# Altium PCB BLDC_BridgeBoard_PCB.PcbDoc
Units mm, origin at the board's own origin, x right, y up, seen from the top; angles counter-clockwise.
Board outline 100 x 87 mm, 4 copper layers (Top Layer, Int1 (GND), Int2 (V12), Bottom Layer), stack 1.369 mm thick; 79 components, 43 nets, 253 pads, 68 vias.
Unrouted connection lines stored in the file: 79.
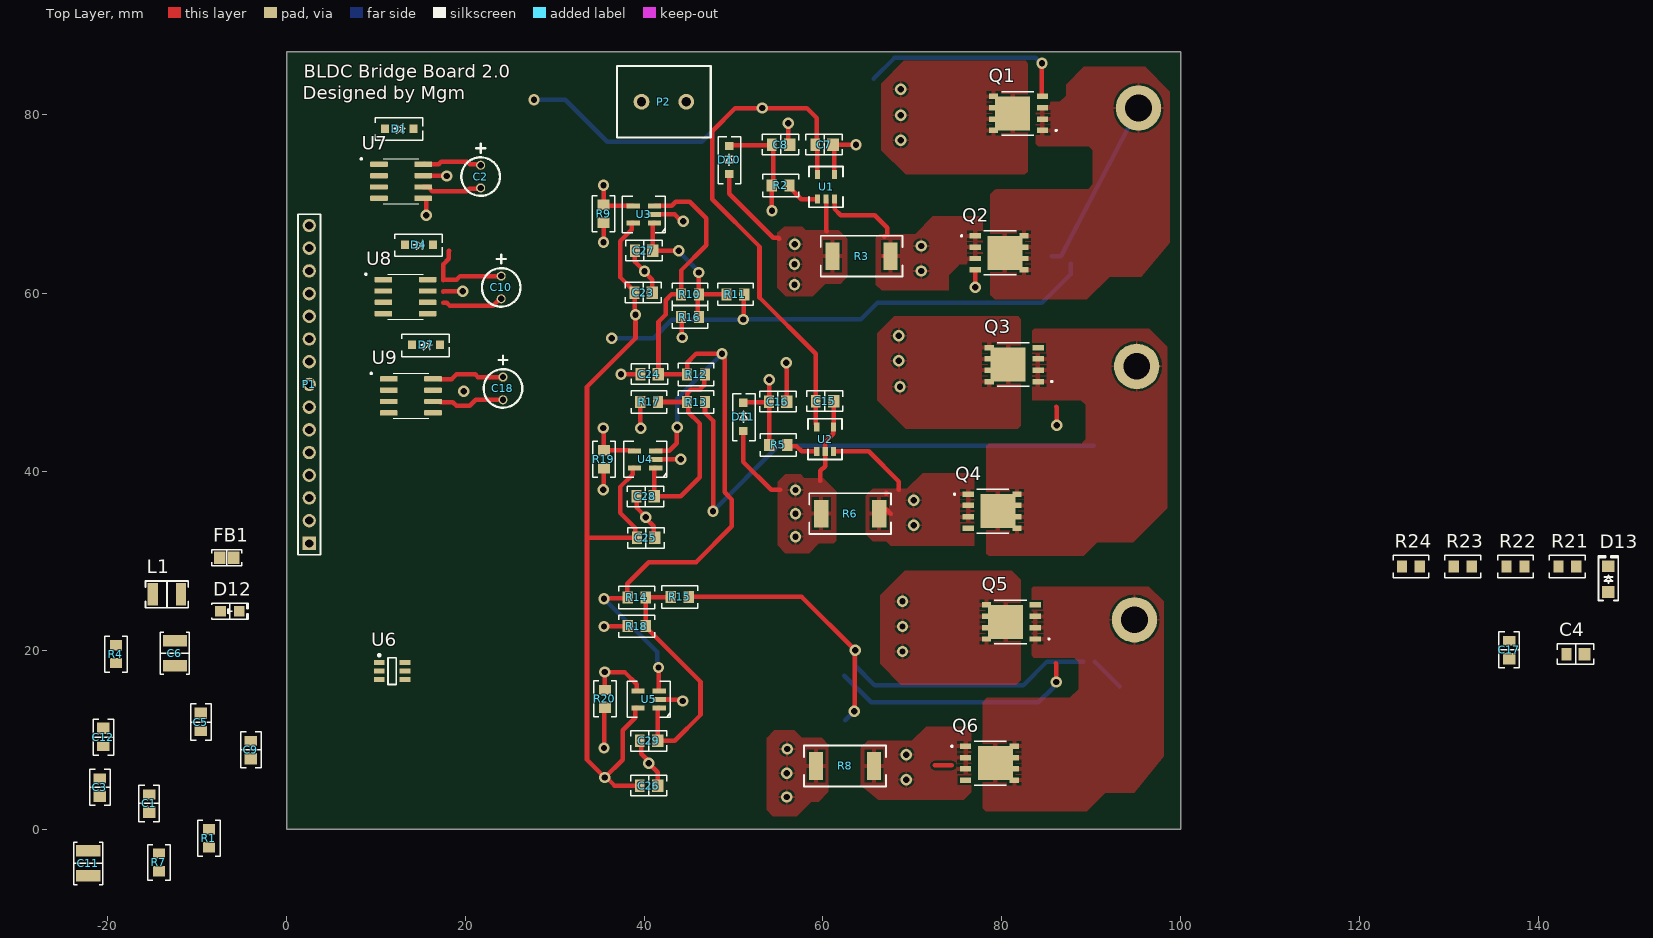
[diagram p0: Top Layer view]
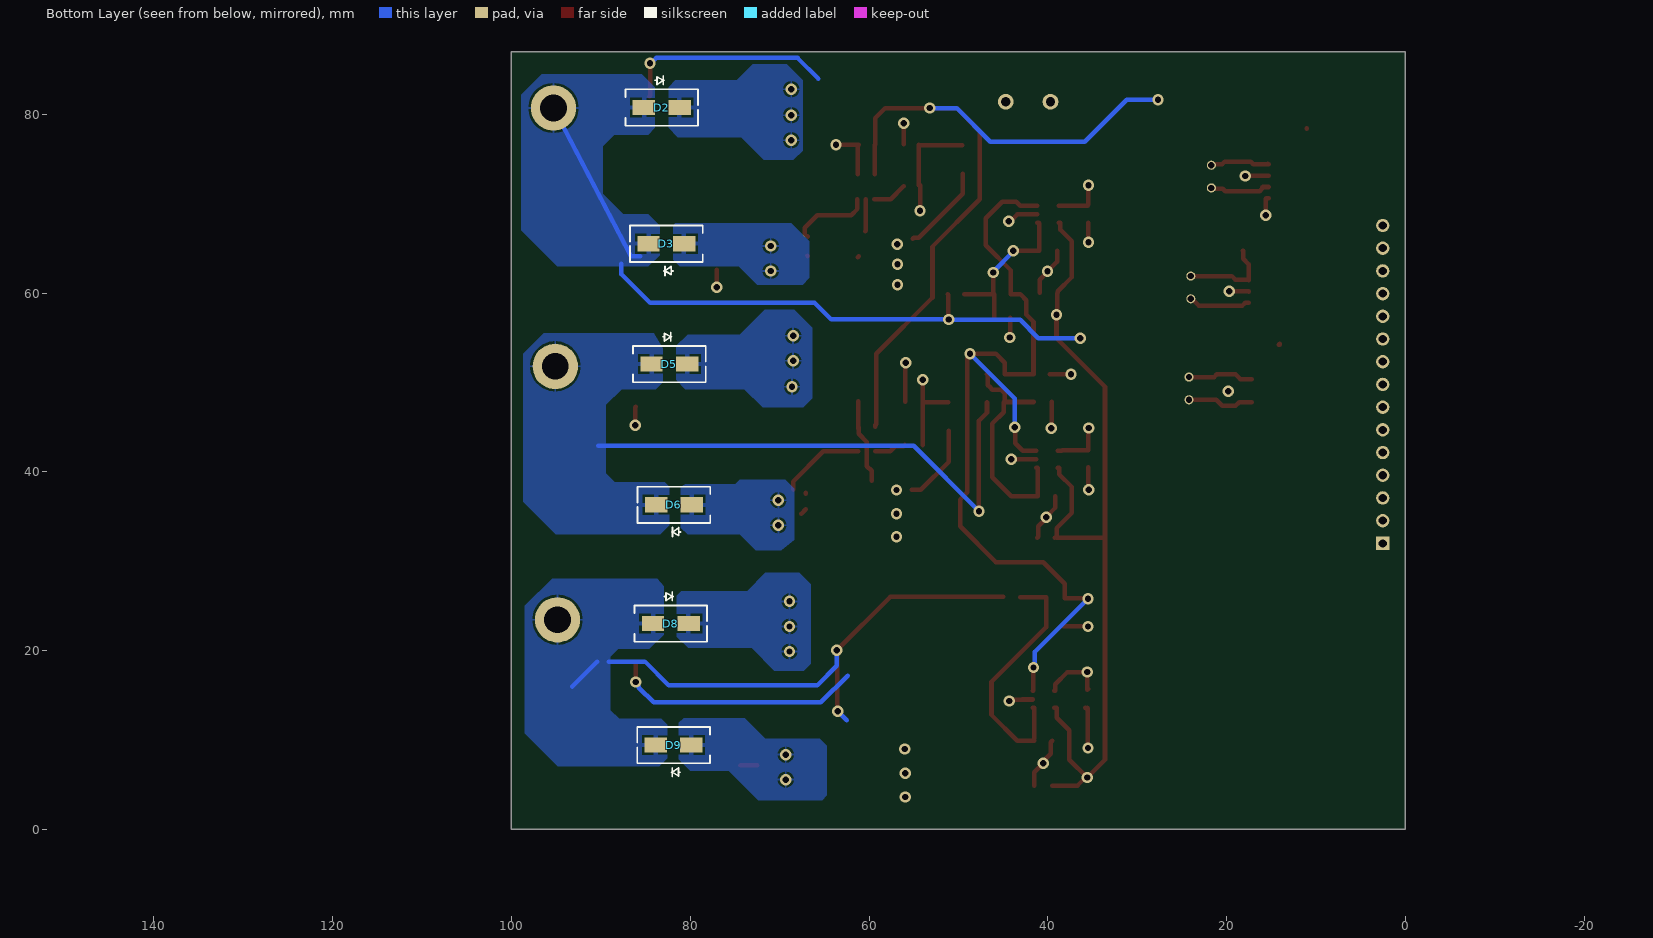
[diagram p1: Bottom Layer view, seen from below]
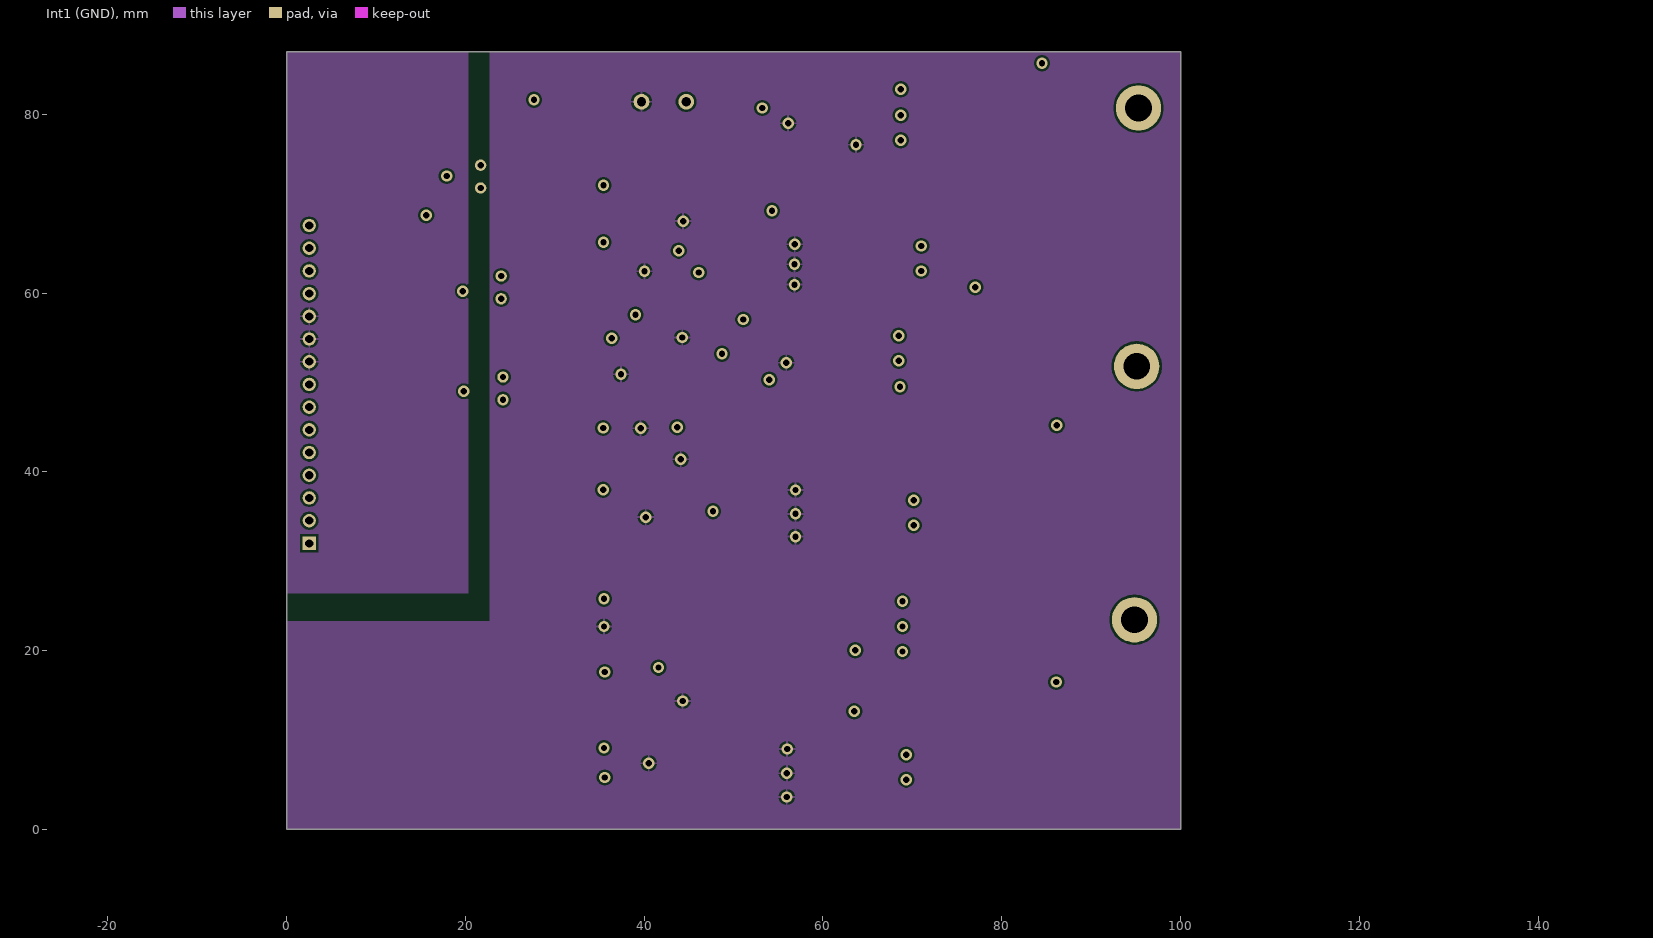
[diagram p2: Int1 (GND)]
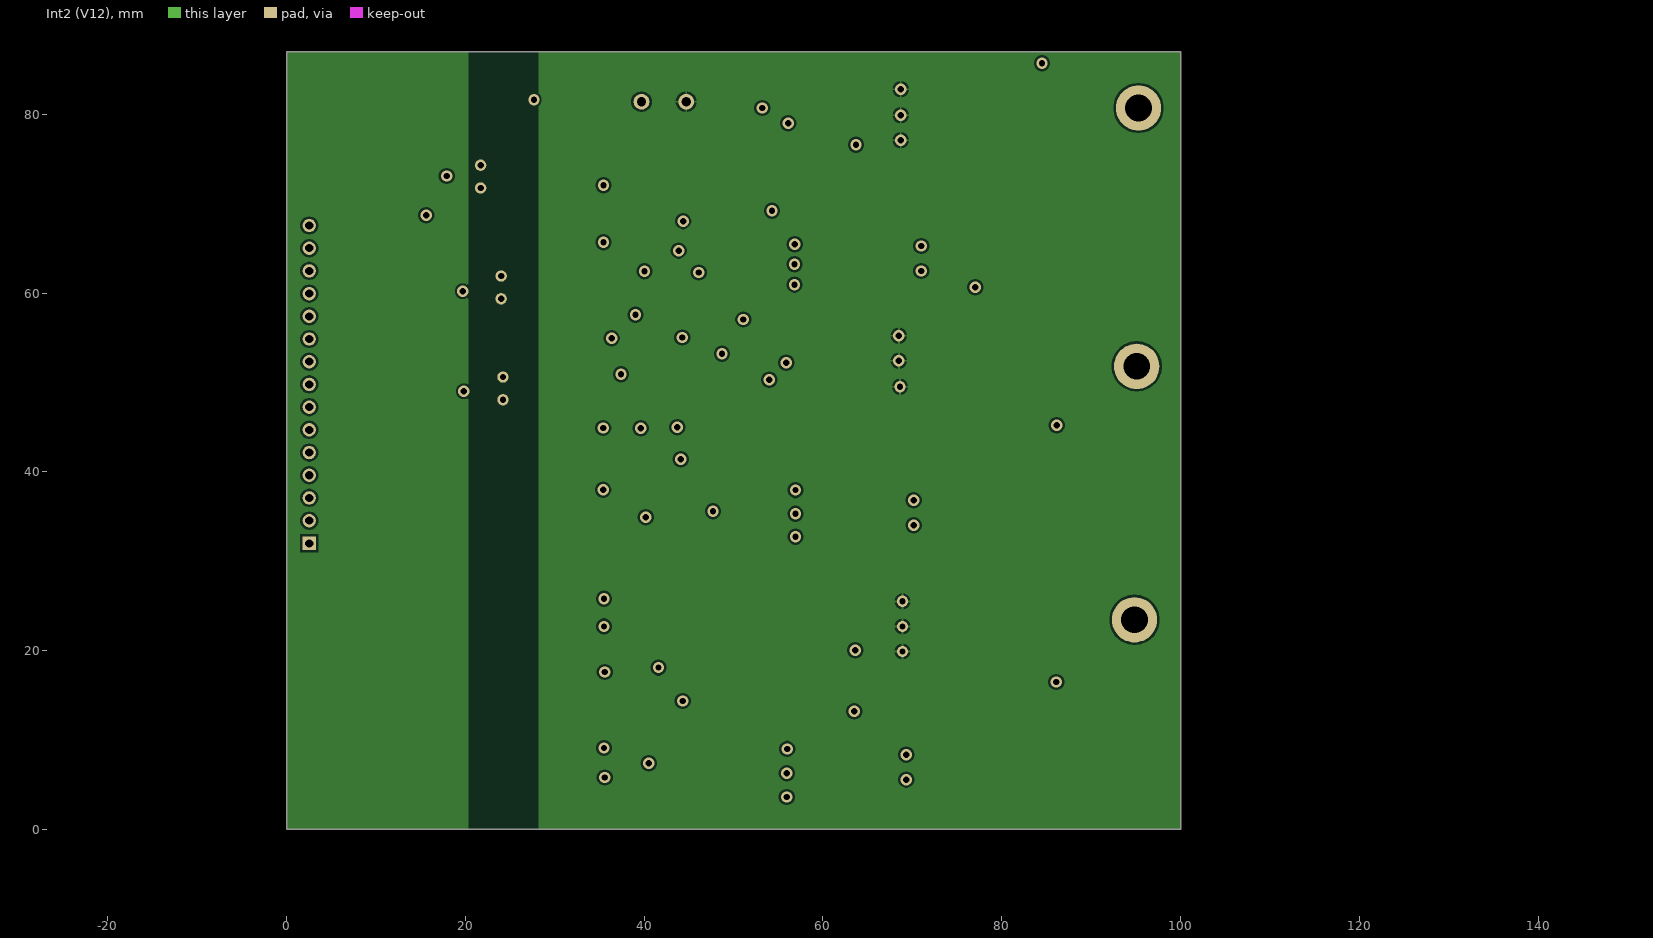
[diagram p3: Int2 (V12)]

## Layer stack, top to bottom
Top Solder: solder mask 0.0254, SM-001, Dk 4
Top Layer: signal copper 0.035
Dielectric 1: prepreg 0.1295, PP-017, Dk 4.3
Dielectric 2: prepreg 0.1295, PP-017, Dk 4.3
Int1 (GND): signal copper 0.035
Dielectric 3: core 0.7112, Core-039, Dk 4.8
Int2 (V12): signal copper 0.035
Dielectric 4: prepreg 0.1295, PP-017, Dk 4.3
Dielectric 5: prepreg 0.1295, PP-017, Dk 4.3
Bottom Layer: signal copper 0.035
Bottom Solder: solder mask 0.0254, SM-001, Dk 4

## Board outline
0,0 100,0 100,87 0,87

## Design rules (kind name [scope] priority, off if disabled: settings)
Clearance [All] p1: gap=0.254 ignorepadtopadclearanceinfootprint=FALSE except(0: Arc-Hole Track-Hole SMDPad-Hole THPad-Hole Via-Hole Fill-Hole Poly-Hole Region-Hole Text-Hole)
HoleSize [All] p1: absolutevalues=TRUE maxlimit=4 minlimit=0.025 maxpercent=80.000 minpercent=20.000
MinimumSolderMaskSliver [All] p1: minsoldermaskwidth=0.22
PolygonConnect PolygonConnect_2 [(IsNamedPolygon('PolygonBigThermal'))] p1: thpad.connectstyle=Relief thpad.reliefconductorwidth=2 thpad.reliefentries=4 thpad.polygonreliefangle="90 Angle" thpad.airgapwidth=0.254 smdpad.connectstyle=Relief smdpad.reliefconductorwidth=2 smdpad.reliefentries=4 smdpad.polygonreliefangle="90 Angle" smdpad.airgapwidth=0.254 via.connectstyle=Direct via.reliefconductorwidth=0.254 via.reliefentries=4 via.polygonreliefangle="90 Angle" via.airgapwidth=0.254
PolygonConnect PolygonConnect_1 [(IsNamedPolygon('PolygonDirect'))] p2: connectstyle=Direct reliefconductorwidth=2 reliefentries=4 polygonreliefangle="90 Angle" airgapwidth=0.254
PolygonConnect [All] p3: thpad.connectstyle=Relief thpad.reliefconductorwidth=0.254 thpad.reliefentries=4 thpad.polygonreliefangle="90 Angle" thpad.airgapwidth=0.254 smdpad.connectstyle=Relief smdpad.reliefconductorwidth=0.508 smdpad.reliefentries=4 smdpad.polygonreliefangle="90 Angle" smdpad.airgapwidth=0.254 via.connectstyle=Relief via.reliefconductorwidth=0.254 via.reliefentries=4 via.polygonreliefangle="90 Angle" via.airgapwidth=0.254
RoutingVias [All] p1: holewidth=0.711 width=1.27 viastyle="Through Hole" minholewidth=0.711 minwidth=1.27 maxholewidth=0.711 maxwidth=1.27
SolderMaskExpansion [All] p1: expansion=0.102 istentingtop=FALSE
UnRoutedNet [All] p1: checkbadconnections=TRUE
Width [All] p1: maxlimit=0.762 minlimit=0.254 preferedwidth=0.508 midlayer1_maxwidth=0.254 midlayer1_prefwidth=0.254 midlayer2_maxwidth=0.254 midlayer2_prefwidth=0.254 minimp=50.000000 maximp=50.000000 favimp=50.000000
27 further rules are at their usual default settings.

## Classes and differential pairs
component class U_6_Power: C3 C4 C5 C6 C11 C12 D12 D13 FB1 L1 R1 R4 R7 R21 R22 R23 R24 U6
component class U_5_ZeroCrossingDetector: C23 C24 C25 C26 C27 C28 C29 R9 R10 R11 R12 R13 R14 R15 R16 R17 R18 R19 R20 U3 U4 U5
component class U_4_Connectors: P1 P2
component class U_3_FET_C: C17 C18 D7 D8 D9 Q5 Q6 R8 U9
component class U_2_FET_B: C9 C10 C15 C16 D4 D5 D6 D11 Q3 Q4 R5 R6 U2 U8
component class U_1_FET_A: C1 C2 C7 C8 D1 D2 D3 D10 Q1 Q2 R2 R3 U1 U7

## Components (designator, comment, footprint, x,y, rotation, side; value= is the part's Value field where it differs from the comment)
C1 "1 µF" "CAP 0805_2012" -15.4,2.9 r270 top
C2 "Cap Pol1" CAPACITORRADIALELECTROLYTIC 21.7,74.3 r270 top value=CB
C3 "0.1 µF" "CAP 0805_2012" -20.9,4.7 r270 top
C4 "0.1 µF" "CAP 0805_2012" 144.2,19.6 r0 top
C5 "0.1 µF" "CAP 0805_2012" -9.6,12 r90 top
C6 "47 µF" "CAP 1210_3225 - 1MM" -12.5,19.7 r270 top
C7 "0.1 µF" "CAP 0805_2012" 60.128,76.608 r0 top
C8 "1 nF" "CAP 0805_2012" 55.264,76.608 r0 top
C9 "1 µF" "CAP 0805_2012" -4,8.9 r270 top
C10 "Cap Pol1" CAPACITORRADIALELECTROLYTIC 24,61.9 r270 top value=CB
C11 "47 µF" "CAP 1210_3225 - 1MM" -22.2,-3.8 r270 top
C12 "10 nF" "CAP 0805_2012" -20.5,10.3 r90 top
C15 "0.1 µF" "CAP 0805_2012" 60.2,47.9 r0 top
C16 "1 nF" "CAP 0805_2012" 54.954,47.843 r0 top
C17 "1 µF" "CAP 0805_2012" 136.779,20.1 r270 top
C18 "Cap Pol1" CAPACITORRADIALELECTROLYTIC 24.2,50.6 r270 top value=CB
C23 "1 nF" "CAP 0805_2012" 39.901,60.038 r0 top
C24 "1 nF" "CAP 0805_2012" 40.584,50.922 r0 top
C25 "1 nF" "CAP 0805_2012" 40.2,32.6 r0 top
C26 "1 nF" "CAP 0805_2012" 40.5,4.9 r0 top
C27 "1 nF" "CAP 0805_2012" 39.964,64.736 r0 top
C28 "1 nF" "CAP 0805_2012" 40.144,37.263 r0 top
C29 "1 nF" "CAP 0805_2012" 40.5,9.9 r0 top
D1 "1N5819WS" SOD-123 12.6,78.4 r0 top
D2 "SK510A-LTP" "DO214AC SMA" 83.186,80.758 r180 bottom
D3 "SK510A-LTP" "DO214AC SMA" 82.678,65.518 r0 bottom
D4 "1N5819WS" SOD-123 14.8,65.4 r0 top
D5 "SK510A-LTP" "DO214AC SMA" 82.332,52.056 r180 bottom
D6 "SK510A-LTP" "DO214AC SMA" 81.824,36.308 r0 bottom
D7 "1N5819WS" SOD-123 15.6,54.2 r0 top
D8 "SK510A-LTP" "DO214AC SMA" 82.176,23.016 r180 bottom
D9 "SK510A-LTP" "DO214AC SMA" 81.872,9.427 r0 bottom
D10 "BZT52C3V0-TP" SOD-123 49.5,74.9 r90 top
D11 "BZT52C3V0-TP" SOD-123 51.1,46.15 r90 top
D12 "Green" "LED 0805_2012 GREEN" -6.35,24.4 r0 top
D13 "VTVS58ASMF-HM3-08" "SMF DO-219AB" 147.879,28 r90 top
FB1 "120 Ohms @ 100 MHz" "FER 0805_2012" -6.7,30.4 r0 top
L1 "22u" "1210 Inductor" -13.4,26.3 r0 top
P1 "Header 15" HDR1X15 2.526,31.996 r90 top
P2 "Header 2" "SCREW HEADER 2 (5 MM PITCH)" 42.2,81.4 r0 top
Q1 "SIR182DP" TRANS_SIR182DP-T1-RE3 81.895,80.095 r180 top
Q2 "SIR182DP" TRANS_SIR182DP-T1-RE3 79.7,64.5 r0 top
Q3 "SIR182DP" TRANS_SIR182DP-T1-RE3 81.4,52 r180 top
Q4 "SIR182DP" TRANS_SIR182DP-T1-RE3 78.91,35.6 r0 top
Q5 "SIR182DP" TRANS_SIR182DP-T1-RE3 81.09,23.2 r180 top
Q6 "SIR182DP" TRANS_SIR182DP-T1-RE3 78.61,7.4 r0 top
R1 "110 kOhms" "RES 0805_2012" -8.7,-1 r90 top
R2 "1 kOhms" "RES 0805_2012" 55.264,72.036 r180 top
R3 "60 mOhms" "STACKPOLE CSR2512" 64.314,64.121 r0 top value="500 µOhms"
R4 "4.7 kOhms" "RES 0805_2012" -19.1,19.6 r90 top
R5 "1 kOhms" "RES 0805_2012" 55,43 r0 top
R6 "60 mOhms" "STACKPOLE CSR2512" 63.042,35.324 r0 top value="500 µOhms"
R7 "75 kOhms" "RES 0805_2012" -14.3,-3.7 r90 top
R8 "60 mOhms" "STACKPOLE CSR2512" 62.466,7.09 r0 top value="500 µOhms"
R9 "10 k" "RES 0805_2012" 35.45,68.875 r270 top
R10 "47 k" "RES 0805_2012" 45.121,59.858 r180 top
R11 "47 k" "RES 0805_2012" 50.201,59.858 r180 top
R12 "47 k" "RES 0805_2012" 45.8,50.9 r180 top
R13 "47 k" "RES 0805_2012" 45.8,47.8 r180 top
R14 "47 k" "RES 0805_2012" 39.167,25.948 r180 top
R15 "47 k" "RES 0805_2012" 43.979,25.997 r180 top
R16 "10 k" "RES 0805_2012" 45.121,57.318 r180 top
R17 "10 k" "RES 0805_2012" 40.55,47.825 r180 top
R18 "10 k" "RES 0805_2012" 39.167,22.73 r180 top
R19 "10 k" "RES 0805_2012" 35.5,41.4 r270 top
R20 "10 k" "RES 0805_2012" 35.6,14.6 r270 top
R21 "1 kOhms" "RES 0805_2012" 143.279,29.4 r0 top
R22 "12 kOhms" "RES 0805_2012" 137.479,29.4 r0 top
R23 "1 kOhms" "RES 0805_2012" 131.579,29.4 r0 top
R24 "24 kOhms" "RES 0805_2012" 125.779,29.4 r0 top
U1 "INA180A1IDBVR" DBV0005A_N 60.344,71.887 r90 top
U2 "INA180A1IDBVR" DBV0005A_N 60.236,43.662 r90 top
U3 "LMV321IDBVR" DBV5 39.964,68.8 r180 top
U4 "LMV321IDBVR" DBV5 40.1,41.4 r180 top
U5 "LMV321IDBVR" DBV5 40.494,14.55 r180 top
U6 "TP6841S6" SOT95P280X125-6M 11.8,17.7 r0 top
U7 "IR2103STRPBF" SOIC8_IR2103STRPBF 12.8,72.5 r0 top
U8 "IR2103STRPBF" SOIC8_IR2103STRPBF 13.3,59.6 r0 top
U9 "IR2103STRPBF" SOIC8_IR2103STRPBF 13.9,48.5 r0 top

## Footprints (in the part's own frame and the unit in brackets; to place one, negate y for a bottom-side part, rotate by r counter-clockwise, add the part's x,y. Pads: shape width x height; smd on the part's side, far side on the other; paste and mask are expansions set on the pad)
"1210 Inductor" [mm] "2-Leads, Body 3.1x2.6mm, IPC Medium Density"
  rect 1.15x2.5 smd: 1(-1.575,0) 2(1.575,0)
  silkscreen extent -2.4,-1.5 2.4,1.5, body extent -1.6,-1.25 1.6,1.25, height 0.7
"CAP 0805_2012" [mm] "Chip Capacitor, 2-Leads, Body 2.00x1.20mm, IPC Medium Density"
  rect 1.1x1.4 smd: 1(-1,0)
  rect 1.3x1.4 smd: 2(1,0)
  silkscreen extent -2.03,-1.15 2.03,1.14, body extent -1,-0.64 1,0.64, height 1.26
"CAP 1210_3225 - 1MM" [mm] "Chip Capacitor, 2-Leads, Body 3.20x2.50mm, IPC Medium Density"
  rect 1.3x2.7 smd: 1(-1.4,0) 2(1.4,0)
  silkscreen extent -2.37,-1.63 2.37,1.63, body extent -1.6,-1.25 1.6,1.25, height 1
CAPACITORRADIALELECTROLYTIC [mil]
  round 40 / inner round 50 / far side round 40 hole 28: 1(0,0) 2(100,0)
  silkscreen extent -95,-85 135,85, body extent -48,-98 148,98, height 493
DBV5 [mil]
  rect 58x22 smd mask-99999: 1(-47,37.4) 2(-47,0) 3(-47,-37.4) 4(47,-37.4) 5(47,37.4)
  silkscreen extent -95,-80 95,80, body extent -59,-60 59,60, height 57
DBV0005A_N [mm]
  rect 1x0.6 smd paste+0 mask+0.051: 1(-1.375,0.95) 2(-1.375,0) 3(-1.375,-0.95) 4(1.375,-0.95) 5(1.375,0.95)
  silkscreen extent -2.29,-1.91 2.29,1.91, body extent -1.4,-1.45 1.4,1.45, height 1.2
"DO214AC SMA" [mm] "Molded Diode, 2-Leads, Body 4.30x2.60mm, IPC Medium Density"
  rect 2.5x1.7 smd: 1(-2,0) 2(2,0)
  silkscreen extent -4.06,-2.03 4.06,3.55, body extent -2.6,-1.37 2.6,1.37, height 2.4
"FER 0805_2012" [mm] "Chip Ferrite, 2-Leads, Body 2.00x1.20mm, IPC Medium Density"
  rect 1.3x1.4 smd: 1(-0.8,0) 2(0.8,0)
  silkscreen extent -1.7,-0.9 1.7,0.9, body extent -1,-0.64 1,0.64, height 1.26
HDR1X15 [mm] "Connector; Header; 15 Position"
  rect 1.5x1.5 hole 0.9: 1(0,0)
  round 1.5 hole 0.9: 2(2.54,0) 3(5.08,0) 4(7.62,0) 5(10.16,0) 6(12.7,0) 7(15.24,0) 8(17.78,0) 9(20.32,0) 10(22.86,0) 11(25.4,0) 12(27.94,0) 13(30.48,0) 14(33.02,0) 15(35.56,0)
  silkscreen extent -1.27,-1.27 36.83,1.27, body extent -1.3,-1.29 36.8,1.25, height 8.13
"LED 0805_2012 GREEN" [mm] "Chip Diode, 2-Leads, Body 2.00x1.25mm, IPC Medium Density"
  rect 1.2x1.2 smd: 1(-1.05,0) 2(1.05,0)
  silkscreen extent -2.03,-0.9 2.03,0.9, body extent -1,-0.62 1,0.63, height 0.9
"RES 0805_2012" [mm] "Chip Resistor, 2-Leads, Body 2.00x1.25mm, IPC Medium Density"
  rect 1.15x1.35 smd: 1(-1,0) 2(1,0)
  silkscreen extent -2,-1.25 2,1.25, body extent -1,-0.62 1,0.63, height 0.6
"SCREW HEADER 2 (5 MM PITCH)" [mil]
  round 70 hole 40: 1(-98.43,0) 2(98.43,0)
  silkscreen extent -207,-157 207,157, body extent -198,-177 219,177, height 516
"SMF DO-219AB" [mm] "Molded Diode, 2-Leads, Body 3.90x1.90mm, IPC Medium Density"
  rect 1.3x1.4 smd: 1(-1.45,0) 2(1.45,0)
  silkscreen extent -2.4,-1.1 2.59,1.1, body extent -1.5,-0.9 1.5,0.9, height 1.18
SOD-123 [mm] "SOD, 2-Leads, Body 1.55x3.70mm, IPC Medium Density"
  rect 0.9x0.95 smd: 1(-1.575,0) 2(1.575,0)
  silkscreen extent -2.7,-1.3 2.6,1.2, body extent -1.86,-0.78 1.86,0.77, height 1.35
SOIC8_IR2103STRPBF [mm]
  rrect25% 1.97x0.6 smd: 1(-2.475,1.905) 2(-2.475,0.635) 3(-2.475,-0.635) 4(-2.475,-1.905) 5(2.475,-1.905) 6(2.475,-0.635) 7(2.475,0.635) 8(2.475,1.905)
  silkscreen extent -4.54,-2.52 2,2.6, body extent -3,-2.5 3,2.5, height 1.75
SOT95P280X125-6M [mm] "SOT23, 6-Leads, Body 2,92x2,80mm, Pitch 0,95mm, IPC Low Density"
  rect 1.2x0.55 smd: 1(-1.45,0.95) 2(-1.45,0) 3(-1.45,-0.95) 4(1.45,-0.95) 5(1.45,0) 6(1.45,0.95)
  silkscreen extent -1.57,-1.5 0.45,1.9, body extent -1.48,-1.51 1.48,1.51, height 1.25
"STACKPOLE CSR2512" [mm] "Chip Resistor, 2-Leads, Body 6.40x3.20mm, IPC Medium Density"
  rect 1.6x3.1 smd: 1(-3.25,0) 2(3.25,0)
  silkscreen extent -4.57,-2.29 4.57,2.29, body extent -3.27,-1.6 3.28,1.6, height 0.5
TRANS_SIR182DP-T1-RE3 [mm]
  rect 1.27x0.61 smd: 1(-2.67,1.905) 2(-2.67,0.635) 3(-2.67,-0.635) 4(-2.67,-1.905)
  rect 1.02x0.61 smd: 5(2.795,-1.905) 6(2.795,-0.635) 7(2.795,0.635) 8(2.795,1.905)
  rect 3.91x3.81 smd paste-3: 9(0.69,0)
  silkscreen extent -4.25,-2.45 1.9,2.45, body extent -3.02,-2.59 3.13,2.56, height 1.18

## Part data
C1 C8 C9 C16 C17 C23 C24 C25 C26 C27 C28 C29: library part CC0805MRX7R9BB104, "CAP CER 0.1UF 50V X7R 0805", Capacitance="0.1 µF", Device Package="0805 (2012 Metric)", Manufacturer=Yageo, Operating Temperature="-55°C ~ 125°C", Supplier Part Number 1=311-4351-1-ND, Temperature Coefficient=X7R, Tolerance=±20%, Voltage - Rated=50V, Applications="General Purpose", ComponentLink1Description=Datasheet, ComponentLink1URL=https://www.yageo.com/upload/media/product/productsearch/datasheet/mlcc/UPY-GPHC_X7R_6.3V-to-50V_18.pdf, ComponentLink2Description="DigiKey Link", ComponentLink2URL=https://www.digikey.com/en/products/detail/yageo/CC0805MRX7R9BB104/5884281, LastUpdated="15/11/2023 20:14:20", Lifecycle Status=Active, Minimum Order=1, Mounting Type="Surface Mount, MLCC", Package / Case="0805 (2012 Metric)", Packaging=TapeAndReel, Part Number=CC0805MRX7R9BB104, Part Status=Active, PartId=2475, Price=0.01, Series=CC, Size / Dimension="0.079\" L x 0.049\" W (2.00mm x 1.25mm)", Supplier 1=DigiKey, Thickness (Max)="0.037\" (0.95mm)"
C2 C10 C18: "Polarized Capacitor (Radial)", LatestRevisionDate=17-Jul-2002, LatestRevisionNote="Re-released for DXP Platform.", PackageDescription="Polarized Capacitor (Radial); 2 Leads", PackageReference=RB7.6-15, Published=8-Jun-2000, Publisher="Altium Limited"
C3 C4 C5 C7 C15: library part CC0805MRX7R9BB104, "CAP CER 0.1UF 50V X7R 0805", Device Package="0805 (2012 Metric)", Manufacturer=Yageo, Operating Temperature="-55°C ~ 125°C", Supplier Part Number 1=311-4351-1-ND, Temperature Coefficient=X7R, Tolerance=±20%, Voltage - Rated=50V, Applications="General Purpose", Capacitance="0.1 µF", ComponentLink1Description=Datasheet, ComponentLink1URL=https://www.yageo.com/upload/media/product/productsearch/datasheet/mlcc/UPY-GPHC_X7R_6.3V-to-50V_18.pdf, ComponentLink2Description="DigiKey Link", ComponentLink2URL=https://www.digikey.com/en/products/detail/yageo/CC0805MRX7R9BB104/5884281, LastUpdated="15/11/2023 20:14:20", Lifecycle Status=Active, Minimum Order=1, Mounting Type="Surface Mount, MLCC", Package / Case="0805 (2012 Metric)", Packaging=TapeAndReel, Part Number=CC0805MRX7R9BB104, Part Status=Active, PartId=2475, Price=0.01, Series=CC, Size / Dimension="0.079\" L x 0.049\" W (2.00mm x 1.25mm)", Supplier 1=DigiKey, Thickness (Max)="0.037\" (0.95mm)"
C6 C11: library part GRM32EC81C476KE15L, "CAP CER 47UF 16V X6S 1210", Device Package="1210 (3225 Metric)", Manufacturer="Murata Electronics", Operating Temperature="-55°C ~ 105°C", Supplier Part Number 1=490-10531-1-ND, Temperature Coefficient=X6S, Tolerance=±10%, Voltage - Rated=16V, Applications="General Purpose", Capacitance="47 µF", ComponentLink1Description=Datasheet, ComponentLink1URL=https://search.murata.co.jp/Ceramy/image/img/A01X/G101/ENG/GRM32EC81C476KE15-01.pdf, ComponentLink2Description="DigiKey Link", ComponentLink2URL=https://www.digikey.com/en/products/detail/murata-electronics/GRM32EC81C476KE15L/5027615, LastUpdated="11/03/2024 7:20:02", Lifecycle Status=Active, Minimum Order=1, Mounting Type="Surface Mount, MLCC", Package / Case="1210 (3225 Metric)", Packaging=TapeAndReel, Part Number=GRM32EC81C476KE15L, Part Status=Active, PartId=23627, Price=0.12, Series=GRM, Size / Dimension="0.126\" L x 0.098\" W (3.20mm x 2.50mm)", Supplier 1=DigiKey, Thickness (Max)="0.106\" (2.70mm)"
C12: library part C0805X103K1RAC3316, "CAP CER 0805 10NF 100V X7R", Capacitance="10000 pF", Device Package="0805 (2012 Metric)", Manufacturer=KEMET, Operating Temperature="-55°C ~ 125°C", Ratings=AEC-Q200, Supplier Part Number 1=399-C0805X103K1RAC3316CT-ND, Temperature Coefficient=X7R, Tolerance=±10%, Voltage - Rated=100V, Applications="Automotive, Boardflex Sensitive", ComponentLink1Description=Datasheet, ComponentLink1URL=https://api.kemet.com/component-edge/download/datasheet/C0805X103K1RAC3316.pdf, ComponentLink2Description="DigiKey Link", ComponentLink2URL=https://www.digikey.com/en/products/detail/kemet/C0805X103K1RAC3316/10315780, Features="Soft Termination", LastUpdated="09/02/2024 20:16:09", Lifecycle Status=Active, Minimum Order=1, Mounting Type="Surface Mount, MLCC", Package / Case="0805 (2012 Metric)", Packaging=TapeAndReel, Part Number=C0805X103K1RAC3316, Part Status=Active, PartId=2565, Price=0.02, Series="SMD Auto X7R VW80808", Size / Dimension="0.079\" L x 0.049\" W (2.00mm x 1.25mm)", Supplier 1=DigiKey, Thickness (Max)="0.039\" (0.98mm)"
D1 D4 D7: library part 1N5819HW-7-F, "DIODE SCHOTTKY 40V 1A SOD123", Capacitance @ Vr, F="60pF @ 4V, 1MHz", Current - Average Rectified (Io)=1A, Current - Reverse Leakage @ Vr="1 mA @ 40 V", Manufacturer="Diodes Incorporated", Operating Temperature - Junction="-65°C ~ 125°C", Package / Case=SOD-123, Supplier Part Number 1=1N5819HW-FDICT-ND, Voltage - DC Reverse (Vr) (Max)="40 V", Voltage - Forward (Vf) (Max) @ If="450 mV @ 1 A", ComponentLink1Description=Datasheet, ComponentLink1URL=https://www.diodes.com/assets/Datasheets/ds30217.pdf, ComponentLink2Description="DigiKey Link", ComponentLink2URL=https://www.digikey.com/en/products/detail/diodes-incorporated/1N5819HW-7-F/814970, Diode Type=Schottky, LastUpdated="11/03/2024 7:46:34", Lifecycle Status=Active, Minimum Order=1, Mounting Type="Surface Mount", Packaging=TapeAndReel, Part Number=1N5819HW-7-F, Part Status=Active, PartId=2212, Price=0.05, Series=-, Speed="Fast Recovery =< 500ns, > 200mA (Io)", Supplier 1=DigiKey, Supplier Device Package=SOD-123
D2 D3 D5 D6 D8 D9: "DIODE SCHOTTKY 100V 5A DO214AC", Capacitance @ Vr, F="200pF @ 4V, 1MHz", Current - Average Rectified (Io)=5A, Current - Reverse Leakage @ Vr="1 mA @ 100 V", Manufacturer="Micro Commercial Co", Operating Temperature - Junction="-55°C ~ 150°C", Package / Case="DO-214AC, SMA", Supplier Device Package="DO-214AC (SMA)", Supplier Part Number 1=SK510A-LTPMSCT-ND, Voltage - DC Reverse (Vr) (Max)="100 V", Voltage - Forward (Vf) (Max) @ If="850 mV @ 5 A", ComponentLink1Description=Datasheet, ComponentLink1URL=https://www.mccsemi.com/pdf/Products/SK52A-L-SK510A-L(DO-214AC).pdf, ComponentLink2Description="DigiKey Link", ComponentLink2URL=https://www.digikey.com/en/products/detail/micro-commercial-co/SK510A-LTP/5114130, Diode Type=Schottky, LastUpdated="29/12/2023 21:23:09", Lifecycle Status=Active, Minimum Order=1, Mounting Type="Surface Mount", Packaging=TapeAndReel, Part Number=SK510A-LTP, Part Status=Active, PartId=2009, Price=0.08, Series=-, Speed="Fast Recovery =< 500ns, > 200mA (Io)", Supplier 1=DigiKey
D10 D11: "DIODE ZENER 3V 200MW SOD123", Current - Reverse Leakage @ Vr="10 µA @ 1 V", Manufacturer="Micro Commercial Co", Operating Temperature="-65°C ~ 150°C", Package / Case=SOD-123, Power - Max="200 mW", Supplier Part Number 1=BZT52C3V0-TPMSCT-ND, Tolerance=±7%, Voltage - Forward (Vf) (Max) @ If="900 mV @ 10 mA", Voltage - Zener (Nom) (Vz)="3 V", ComponentLink1Description=Datasheet, ComponentLink1URL=https://www.mccsemi.com/pdf/Products/BZT52C2V4~BZT52C51(500mW)(SOD-123).pdf, ComponentLink2Description="DigiKey Link", ComponentLink2URL=https://www.digikey.com/en/products/detail/micro-commercial-co/BZT52C3V0-TP/806039, Impedance (Max) (Zzt)="95 Ohms", LastUpdated="27/12/2023 21:24:01", Lifecycle Status=Active, Minimum Order=1, Mounting Type="Surface Mount", Packaging=TapeAndReel, Part Number=BZT52C3V0-TP, Part Status=Active, PartId=2097, Price=0.01, Series=-, Supplier 1=DigiKey, Supplier Device Package=SOD-123
D12: library part SM0805UGC, "LED GREEN CLEAR 0805 SMD", Current - Test=20mA, Device Package="0805 (2012 Metric)", Lens Color=Colorless, Manufacturer="Bivar Inc.", Millicandela Rating=10mcd, Supplier Device Package=0805, Supplier Part Number 1=492-1329-1-ND, Voltage - Forward (Vf) (Typ)=2V, Color=Green, ComponentLink1Description=Datasheet, ComponentLink1URL=https://www.bivar.com/Files/Datasheets/SM0805UGC.pdf, ComponentLink2Description="DigiKey Link", ComponentLink2URL=https://www.digikey.com/en/products/detail/bivar-inc/SM0805UGC/2408549, Configuration=Standard, Height (Max)=1.10mm, LastUpdated="11/03/2024 7:52:46", Lens Size="1.40mm x 1.20mm", Lens Style="Rectangle with Flat Top", Lens Transparency=Clear, Lifecycle Status=Active, Minimum Order=1, Mounting Type="Surface Mount", Package / Case="0805 (2012 Metric)", Packaging=TapeAndReel, Part Number=SM0805UGC, Part Status=Active, PartId=247, Price=0.19, Series=-, Size / Dimension="2.00mm L x 1.20mm W", Supplier 1=DigiKey, Viewing Angle=130°, Wavelength - Dominant=565nm, Wavelength - Peak=563nm
D13: "TVS DIODE 57.6V 98V DO219AB", Capacitance @ Frequency="245pF @ 1MHz", Current - Peak Pulse (10/1000µs)=3.89A, Manufacturer="Vishay Semiconductor Diodes Division", Operating Temperature="-55°C ~ 175°C (TJ)", Package / Case=DO-219AB, Power - Peak Pulse=400W, Power Line Protection=No, Supplier Device Package="DO-219AB (SMF)", Supplier Part Number 1=112-VTVS58ASMF-HM3-08CT-ND, Voltage - Breakdown (Min)=64.6V, Voltage - Clamping (Max) @ Ipp=98V, Voltage - Reverse Standoff (Typ)=57.6V, Applications=Automotive, ComponentLink1Description=Datasheet, ComponentLink1URL=http://www.vishay.com/docs/85891/vtvs3v3asmf.pdf, ComponentLink2Description="DigiKey Link", ComponentLink2URL=http://digikey.com/product-detail/en/vishay-semiconductor-diodes-division/VTVS58ASMF-HM3-08/112-VTVS58ASMF-HM3-08CT-ND/11562600, LastUpdated="11/03/2024 8:09:28", Lifecycle Status=Active, Minimum Order=0, Mounting Type="Surface Mount", Packaging=TapeAndReel, Part Number=VTVS58ASMF-HM3-08, Part Status="-55°C ~ 175°C (TJ)", PartId=5476, Price=0.10, Series="Automotive, AEC-Q101, TransZorb®", Supplier 1=DigiKey, Type=DO-219AB, Unidirectional Channels=1
FB1: library part "Ferrite Chip 0805", "SMT Ferrite Chip"
L1: library part Inductor, "SMT Inductor"
P1: "Header, 15-Pin", LatestRevisionDate=17-Jul-2002, LatestRevisionNote="Re-released for DXP Platform.", Publisher="Altium Limited"
P2: "Header, 2-Pin", LatestRevisionDate=17-Jul-2002, LatestRevisionNote="Re-released for DXP Platform.", Publisher="Altium Limited"
Q1 Q2 Q3 Q4 Q5 Q6: library part SIR182DP-T1-RE3, "N-Channel 60V 60A _Tc_ 69.4W _Tc_ Surface Mount PowerPAKÂ® SO-8", Package="SO-8 Vishay Siliconix", Availability=Unavailable, MF="Vishay Siliconix", MP=SIR182DP-T1-RE3, Price=None, SnapEDA_Link=https://www.snapeda.com/parts/SIR182DP-T1-RE3/Vishay%20Siliconix/view-part/3228614/?ref=snap
R1: library part CRCW0805110KFKEA, "RES SMD 110K OHM 1% 1/8W 0805", Device Package="0805 (2012 Metric)", Manufacturer="Vishay Dale", Operating Temperature="-55°C ~ 155°C", Power (Watts)="0.125W, 1/8W", Ratings=AEC-Q200, Supplier Device Package=0805, Supplier Part Number 1=541-110KCCT-ND, Temperature Coefficient=±100ppm/°C, Tolerance=±1%, ComponentLink1Description=Datasheet, ComponentLink1URL=http://www.vishay.com/docs/20035/dcrcwe3.pdf, ComponentLink2Description="DigiKey Link", ComponentLink2URL=https://www.digikey.com/en/products/detail/vishay-dale/CRCW0805110KFKEA/1175869, Composition="Thick Film", Features="Automotive AEC-Q200", Height - Seated (Max)="0.020\" (0.50mm)", LastUpdated="08/02/2024 21:02:11", Lifecycle Status=Active, Minimum Order=1, Number of Terminations=2, Package / Case="0805 (2012 Metric)", Packaging=TapeAndReel, Part Number=CRCW0805110KFKEA, Part Status=Active, PartId=34096, Price=0.01, Resistance="110 kOhms", Series=CRCW, Size / Dimension="0.079\" L x 0.049\" W (2.00mm x 1.25mm)", Supplier 1=DigiKey
R2 R5 R9 R10 R11 R12 R13 R14 R15 R16 R17 R18 R19 R20 R21 R23: library part CR0805-JW-204ELF, "RES SMD 200K OHM 5% 1/8W 0805", Device Package="0805 (2012 Metric)", Manufacturer="Bourns Inc.", Operating Temperature="-55°C ~ 155°C", Power (Watts)="0.125W, 1/8W", Resistance="200 kOhms", Supplier Device Package=0805, Supplier Part Number 1=118-CR0805-JW-204ELFCT-ND, Temperature Coefficient=±200ppm/°C, Tolerance=±5%, ComponentLink1Description=Datasheet, ComponentLink1URL=https://www.bourns.com/docs/product-datasheets/cr.pdf?sfvrsn=574d41f6_14, ComponentLink2Description="DigiKey Link", ComponentLink2URL=https://www.digikey.com/en/products/detail/bourns-inc/CR0805-JW-204ELF/3785267, Composition="Thick Film", Features="Moisture Resistant", Height - Seated (Max)="0.024\" (0.60mm)", LastUpdated="02/11/2023 20:02:13", Lifecycle Status=Active, Minimum Order=1, Number of Terminations=2, Package / Case="0805 (2012 Metric)", Packaging=TapeAndReel, Part Number=CR0805-JW-204ELF, Part Status=Active, PartId=69673, Price=0.01, Series=CR0805, Size / Dimension="0.079\" L x 0.049\" W (2.00mm x 1.25mm)", Supplier 1=DigiKey
R3 R6 R8: library part CSR2512C0R0005F, "RES SMD 500 UOHM 1% 3W 2512", Device Package="2512 (6432 Metric)", Manufacturer=Riedon, Operating Temperature="-55°C ~ 170°C", Power (Watts)=3W, Resistance="500 µOhms", Supplier Device Package=2512, Supplier Part Number 1=696-1183-1-ND, Temperature Coefficient=±100ppm/°C, Tolerance=±1%, ComponentLink1Description=Datasheet, ComponentLink1URL=https://riedon.com/media/pdf/CSR.pdf, ComponentLink2Description="DigiKey Link", ComponentLink2URL=http://digikey.com/product-detail/en/riedon/CSR2512C0R0005F/696-1183-1-ND/2813308, Composition="Metal Element", Features="Current Sense, Non-Inductive", Height - Seated (Max)="0.057\" (1.45mm)", LastUpdated="25/11/2023 21:15:30", Lifecycle Status=Active, Minimum Order=1, Number of Terminations=2, Packaging=TapeAndReel, Part Number=CSR2512C0R0005F, Part Status=Active, PartId=3098, Price=0.20, Series=CSR, Size / Dimension="0.250\" L x 0.118\" W (6.35mm x 3.00mm)", Supplier 1=DigiKey
R4: library part RCS08054K70JNEA, "RES SMD 4.7K OHM 5% 1/2W 0805", Device Package="0805 (2012 Metric)", Manufacturer="Vishay Dale", Operating Temperature="-55°C ~ 155°C", Power (Watts)="0.5W, 1/2W", Ratings=AEC-Q200, Supplier Device Package=0805, Supplier Part Number 1=541-2866-1-ND, Temperature Coefficient=±200ppm/°C, Tolerance=±5%, ComponentLink1Description=Datasheet, ComponentLink1URL=http://www.vishay.com/docs/20065/rcse3.pdf, ComponentLink2Description="DigiKey Link", ComponentLink2URL=https://www.digikey.com/en/products/detail/vishay-dale/RCS08054K70JNEA/5867012, Composition="Thick Film", Features="Automotive AEC-Q200, Pulse Withstanding", Height - Seated (Max)="0.020\" (0.50mm)", LastUpdated="08/02/2024 21:02:38", Lifecycle Status=Active, Minimum Order=1, Number of Terminations=2, Package / Case="0805 (2012 Metric)", Packaging=TapeAndReel, Part Number=RCS08054K70JNEA, Part Status=Active, PartId=27839, Price=0.02, Resistance="4.7 kOhms", Series="RCS e3", Size / Dimension="0.079\" L x 0.049\" W (2.00mm x 1.25mm)", Supplier 1=DigiKey
R7: library part RT0805DRD0775KL, "RES SMD 75K OHM 0.5% 1/8W 0805", Device Package="0805 (2012 Metric)", Manufacturer=Yageo, Operating Temperature="-55°C ~ 155°C", Power (Watts)="0.125W, 1/8W", Supplier Device Package=0805, Supplier Part Number 1=311-2766-1-ND, Temperature Coefficient=±25ppm/°C, Tolerance=±0.5%, ComponentLink1Description=Datasheet, ComponentLink1URL=https://www.yageo.com/upload/media/product/productsearch/datasheet/rchip/PYu-RT_1-to-0.01_RoHS_L_11.pdf, ComponentLink2Description="DigiKey Link", ComponentLink2URL=https://www.digikey.com/en/products/detail/yageo/RT0805DRD0775KL/1078303, Composition="Thin Film", Height - Seated (Max)="0.024\" (0.60mm)", LastUpdated="08/02/2024 21:02:28", Lifecycle Status=Active, Minimum Order=1, Number of Terminations=2, Package / Case="0805 (2012 Metric)", Packaging=TapeAndReel, Part Number=RT0805DRD0775KL, Part Status=Active, PartId=30296, Price=0.02, Resistance="75 kOhms", Series=RT, Size / Dimension="0.079\" L x 0.049\" W (2.00mm x 1.25mm)", Supplier 1=DigiKey
R22: library part CRGP0805F12K, "RES 12K OHM 1% 1/3W 0805", Device Package="0805 (2012 Metric)", Manufacturer="TE Connectivity Passive Product", Operating Temperature="-55°C ~ 155°C", Power (Watts)="0.333W, 1/3W", Supplier Device Package=0805, Supplier Part Number 1=A130490CT-ND, Temperature Coefficient=±100ppm/°C, Tolerance=±1%, ComponentLink1Description=Datasheet, ComponentLink1URL=https://www.te.com/commerce/DocumentDelivery/DDEController?Action=srchrtrv&DocNm=9-1773463-9&DocType=DS&DocLang=English, ComponentLink2Description="DigiKey Link", ComponentLink2URL=https://www.digikey.com/en/products/detail/te-connectivity-passive-product/CRGP0805F12K/8577092, Composition="Thick Film", Features="Pulse Withstanding", Height - Seated (Max)="0.026\" (0.65mm)", LastUpdated="08/02/2024 21:02:34", Lifecycle Status=Active, Minimum Order=1, Number of Terminations=2, Package / Case="0805 (2012 Metric)", Packaging=TapeAndReel, Part Number=CRGP0805F12K, Part Status=Active, PartId=28729, Price=0.02, Resistance="12 kOhms", Series=CRGP, Size / Dimension="0.079\" L x 0.049\" W (2.00mm x 1.25mm)", Supplier 1=DigiKey
R24: library part CRG0805F24K, "RES SMD 24K OHM 1% 1/8W 0805", Device Package="0805 (2012 Metric)", Manufacturer="TE Connectivity Passive Product", Operating Temperature="-55°C ~ 155°C", Power (Watts)="0.125W, 1/8W", Supplier Device Package=0805, Supplier Part Number 1=A126353CT-ND, Temperature Coefficient=±100ppm/°C, Tolerance=±1%, ComponentLink1Description=Datasheet, ComponentLink1URL=https://www.te.com/commerce/DocumentDelivery/DDEController?Action=srchrtrv&DocNm=1773204&DocType=DS&DocLang=English, ComponentLink2Description="DigiKey Link", ComponentLink2URL=https://www.digikey.com/en/products/detail/te-connectivity-passive-product/CRG0805F24K/2380875, Composition="Thick Film", Height - Seated (Max)="0.026\" (0.65mm)", LastUpdated="08/02/2024 21:02:08", Lifecycle Status=Active, Minimum Order=1, Number of Terminations=2, Package / Case="0805 (2012 Metric)", Packaging=TapeAndReel, Part Number=CRG0805F24K, Part Status=Active, PartId=34700, Price=0.01, Resistance="24 kOhms", Series="CRG, Neohm", Size / Dimension="0.079\" L x 0.049\" W (2.00mm x 1.25mm)", Supplier 1=DigiKey
U1 U2 U3 U4 U5: "No Description Available", Mfr_Name="Texas Instruments", Copyright="Copyright (C) 2023 Ultra Librarian. All rights reserved.", RefDes=RefDes, Type=DEV
  U1 U2: Manufacturer_Part_Number=INA180A1IDBVR
  U3 U4 U5: Manufacturer_Part_Number=LMV321IDBVR
U6: "TP6841S6 Power Supply. 4.5 to 40 V input voltage. Up to 800 mA output current.", ComponentLink1Description="New link"
U7 U8 U9: "Floating channel designed for bootstrap operation", Package="SOIC-8 International Rectifier", Availability=Unavailable, MF=Infineon, MP=IR2103STRPBF, Price=None, SnapEDA_Link=https://www.snapeda.com/parts/IR2103STRPBF/Infineon%20Technologies/view-part/56821/?ref=snap

## Free pads (board coordinates)
  round 5.08 hole 3: 4(94.854,23.446) 4(95.1,51.8) 4(95.3,80.7)

## Via types
v1: diameter 1.27, hole 0.711, Top Layer to Bottom Layer, 68 vias

## Nets (pads, with @x,y where several pads share a name; then routed paths per layer and width w, separated by ;. In a path a pad name is that pad's centre, name@x,y a point inside that pad or via, vN(x,y) a via of type N, cw(c..) or ccw(c..) an arc to the next point about the centre after c; other vN are vias at no path point)
AGND: C1.1 C4.1 C5.1 C6.1 C7.2 C8.2 C9.1 C11.1 C12.1 C15.2 C16.2 C17.1 C23.2 C24.1 C25.2 C26.2 C27.1 C28.1 C29.1 D10.1 D11.1 D13.1 P2.1 R3.1 R6.1 R8.1 R16.2 R17.2 R18.2 R21.1 R22.1 R23.1 R24.1 U1.2 U1.4 U2.2 U2.4 U3.2 U4.2 U5.2 U6.2 U7.4 U8.4 U9.4 | length 80.7
  Top Layer w0.508: v1(35.5,22.7) 35.515,22.715 38.277,22.715 R18.2@38.292,22.73 ; v1(37.409,50.922) C24.1@39.784,50.922 ; C27.1 38.964,63.515 v1(40.028,62.451) 40.028,62.373 40.901,61.5 C23.2 ; C28.1 39.144,36.001 40.182,34.963 40.182,34.779 41.055,33.906 41.055,32.745 C25.2 ; C29.1 39.668,9.732 39.668,8.438 40.5,7.606 v1(40.5,7.4) 41.5,6.4 C26.2 ; R17.2 39.575,47.8 39.575,44.9 v1(39.6,44.875) ; U3.2 43.394,68.8 44.144,68.05 v1(44.35,68.05) ; U4.2 v1(44.1,41.4) ; U5.2 41.713,14.525 42.878,14.525 42.903,14.5 44.157,14.5 v1(44.3,14.357) ; v1@44.185,55.09 R16.2@44.185,57.258 ; D10.1 49.5,71.1 54.418,66.182 55.018,66.182 55.1,66.1 ; D11.1 51.1,41.1 54.2,38 55.2,38 ; v1(55.9,52.2) 55.927,52.173 55.927,47.87 C16.2 ; C8.2@56.093,76.637 56.093,78.993 v1(56.1,79) ; 59.7,39 59.7,40.1 60.236,40.636 60.236,43.336 61.14,44.24 61.14,44.991 U2.4 ; U1.2 60.344,66.956 60.4,66.9 ; C7.2 61.132,76.604 63.696,76.604 v1(63.7,76.6) ; R3.1@61.14,64.121 R3.1@61.237,64.024 ; U2.4@61.193,44.844 61.193,47.893 C15.2 ; U1.4@61.248,73.308 C7.2@61.248,76.288
  other v1: 55.939,3.62 55.964,6.27 55.989,8.995 56.932,32.752 40.182,34.93 56.932,35.292 56.932,37.959 44.25,55.025 56.821,60.946 56.821,63.232 56.846,65.467
BOOTSTRAP_IC_A_INPUT: C2.1 D1.2 U7.8 | length 6.8
  Top Layer w0.508: U7.8 U7.8@15.354,74.405 ; U7.8@15.4,74.451 U7.8@15.354,74.405 ; C2.1 21.603,74.397 20.505,74.397 20.19,74.712 17.312,74.712 17.005,74.405 U7.8@15.354,74.405
BOOTSTRAP_IC_B_INPUT: C10.1 D4.2 U8.8 | length 10.3
  Top Layer w0.508: 18.175,64.75 18.136,64.711 18.136,63.836 17.5,63.2 17.5,61.44 17.571,61.511 19.011,61.511 19.4,61.9 C10.1
BOOTSTRAP_IC_C_INPUT: C18.1 D7.2 U9.8 | length 7.4
  Top Layer w0.508: U9.8@17.2,50.345 18.445,50.345 19,50.9 21.1,50.9 21.4,50.6 C18.1
BUCK_BST: C3.2 U6.1
BUCK_EN: R1.1 R22.2 U6.4
BUCK_FB: R7.1 R24.2 U6.3
BUCK_SW: C3.1 L1.1 U6.6
BUCK_VIN: C5.2 C6.2 FB1.2 R1.2 U6.5
GND: P1.9 P1.10 P1.11 R9.2 R19.2 R20.2 | length 9.4
  Top Layer w0.508: v1(35.4,38) 35.45,38.05 35.45,40.475 R19.2@35.5,40.525 ; v1(35.45,65.693) R9.2 ; v1(35.5,9.1) 35.55,9.15 35.55,13.55 R20.2 ; R20.2@35.75,13.55 R20.2@35.8,13.6
LED_PWR_K: D12.2 R21.2
NetD9_1: D9.1 Q6.1 Q6.2 Q6.3 R8.2
  other v1: 69.324,5.566 69.324,8.36
PHA: C2.2 D2.1 D3.2 pad.4@95.3,80.7 Q1.1 Q1.2 Q1.3 Q2.5 Q2.6 Q2.7 Q2.8 Q2.9 R11.1 U7.6 | length 84.9
  Top Layer w0.508: U7.6 15.96,71.865 16.006,71.819 16.006,71.701 16.307,71.4 20.163,71.4 20.43,71.667 21.607,71.667 C2.2 ; v1(51.1,57.043) 51.15,57.094 51.15,59.808 R11.1
  Bottom Layer w0.508: v1(36.35,54.95) 41.05,54.95 43.1,57 51.057,57 v1(51.1,57.043) ; v1@51.143,57.043 64.243,57.043 66.1,58.9 84.5,58.9 87.7,62.1 87.7,63.3 ; 85.599,64.121 86.615,64.121 pad.4@95.3,80.7
PHA_A_ADC: C8.1 D10.2 P1.2 R2.2 | length 12.2
  Top Layer w0.508: D10.2@49.566,76.541 C8.1@54.397,76.541 ; R2.2 54.264,69.236 v1(54.3,69.2) ; R2.2@54.426,72.073 C8.1@54.426,76.57
PHA_A_ADC_NF: R2.1 U1.1 | length 3.8
  Top Layer w0.508: R2.1@56.139,71.936 57.563,70.512 U1.1
PHA_B_ADC: C16.1 D11.2 P1.1 R5.1 | length 10
  Top Layer w0.508: D11.2@51.159,47.784 C16.1@53.895,47.784 ; C16.1 53.977,47.82 53.977,43.023 R5.1 ; C16.1@53.977,47.866 v1@53.977,50.277
  other v1: 54,50.3
PHA_B_ADC_NF: R5.2 U2.1 | length 3.6
  Top Layer w0.508: R5.2 56.139,42.861 57.039,42.861 57.613,42.287 U2.1
PHB: C10.2 D5.1 D6.2 pad.4@95.1,51.8 Q3.1 Q3.2 Q3.3 Q4.5 Q4.6 Q4.7 Q4.8 Q4.9 R13.1 U8.6 | length 65.2
  Top Layer w0.508: 17.5,58.9 17.925,58.9 18.225,58.6 23.103,58.6 23.863,59.36 C10.2 ; R13.1 46.8,46.6 47.7,45.7 v1(47.7,35.6)
  Bottom Layer w0.508: v1(47.7,35.6) 55,42.9 90.318,42.9
PHC: C18.2 D8.1 D9.2 pad.4@94.854,23.446 Q5.1 Q5.2 Q5.3 Q6.5 Q6.6 Q6.7 Q6.8 Q6.9 R15.1 U9.6 | length 70
  Top Layer w0.508: U9.6@17.2,47.805 17.205,47.8 18.6,47.8 19,47.4 20.5,47.4 21.16,48.06 C18.2 ; R15.1 57.628,25.997 v1(63.6,20.025) 63.55,19.975 63.55,13.25 v1(63.5,13.2)
  Bottom Layer w0.508: 62.5,12.2 v1(63.5,13.2) ; v1(63.6,20.025) 63.6,18.3 65.8,16.1 82.398,16.1 85.072,18.774 89.136,18.774 ; 90.42,18.774 93.214,15.98
PHV_U: C27.2 R10.1 R11.2 R16.1 U3.1 | length 17.9
  Top Layer w0.508: U3.1 40.989,67.85 40.964,67.825 C27.2 40.971,64.743 43.843,64.743 v1(43.85,64.75) ; R16.1@45.996,57.318 45.996,59.858 R10.1 ; v1(46.1,62.3) 46.11,62.289 46.11,59.869 R10.1 ; R11.2@49.326,59.858 R11.2 R10.1
  Bottom Layer w0.508: v1(43.85,64.75) 43.85,64.65 46.1,62.4 v1(46.1,62.3)
PHV_V: C28.2 R12.1 R13.2 R17.1 U4.1 | length 25.9
  Top Layer w0.508: U4.1 41.169,40.45 41.144,40.425 C28.2 41.163,37.281 44.081,37.281 46.2,39.4 46.2,45.4 44.939,46.661 R13.2@44.939,47.761 ; R17.1 41.563,47.813 R13.2@44.787,47.813 ; R13.2 44.8,48.8 45.2,49.2 46.202,49.2 46.5,49.498 46.5,49.5 46.7,49.7 46.7,50.8 R12.1
PHV_W: C29.2 R14.1 R15.2 R18.1 U5.1 | length 28.3
  Top Layer w0.508: R14.1 R18.1 40.167,22.63 46.3,16.497 46.3,12.8 43.4,9.9 C29.2 ; R14.1@40.167,25.972 R15.2@43.079,25.972 ; C29.2@41.5,10.119 41.5,13.575 41.525,13.6 U5.1
PWM1_A: P1.8 U7.2
PWM1_B: P1.7 U7.3
PWM2_A: P1.6 U8.2
PWM2_B: P1.5 U8.3
PWM3_A: P1.4 U9.2
PWM3_B: P1.3 U9.3
V3.3: C7.1 C11.2 C15.1 C23.1 C25.1 C26.1 D12.1 L1.2 R7.2 U1.5 U2.5 U3.5 U4.5 U5.5 | length 181.6
  Top Layer w0.508: U3.5 38.632,67.85 38.606,67.825 38.606,67.106 37.3,65.8 37.3,61.789 38.901,60.188 C23.1 38.963,59.976 38.963,57.637 v1(39.025,57.575) 39.025,54.925 33.6,49.5 33.6,32.6 ; U4.5 38.881,40.425 38.706,40.425 38.706,39.706 37.3,38.3 37.3,35.4 38.994,33.706 38.994,32.806 C25.1 ; C25.1@38.994,32.6 33.6,32.6 ; U5.5 39.025,13.6 39,13.575 39,12.5 37.6,11.1 37.6,7.8 v1(35.6,5.8) ; C26.1 36.676,4.9 35.776,5.8 v1(35.6,5.8) ; U2.5 59.286,45.237 59.2,45.323 59.2,53.2 52.9,59.5 52.9,65.2 47.6,70.5 47.6,78.1 50.2,80.7 v1(53.2,80.7) 58.2,80.7 59.326,79.574 C7.1@59.326,76.609 ; U1.5@59.361,73.295 C7.1@59.361,76.575 ; 33.6,32.6 33.6,7.8 v1(35.6,5.8)
  Bottom Layer w0.508: v1(27.672,81.62) 31.18,81.62 35.879,76.921 46.421,76.921 50.2,80.7 v1(53.2,80.7)
V12: C1.2 C4.2 C9.2 C17.2 D1.1 D2.2 D4.1 D5.2 D7.1 D8.2 D13.2 FB1.1 P2.2 Q1.5 Q1.6 Q1.7 Q1.8 Q1.9 Q3.5 Q3.6 Q3.7 Q3.8 Q3.9 Q5.5 Q5.6 Q5.7 Q5.8 Q5.9 R4.2 U7.1 U8.1 U9.1 | length 0.3
  Top Layer w0.508: D1.1@11.013,78.413 D1.1 D1.1@11.025,78.375 ; D7.1 D7.1@14.087,54.263 ; D7.1@14.042,54.308 D7.1@14.087,54.263 ; D7.1@14.161,54.211 14.15,54.2 D7.1@14.087,54.263
  other v1: 68.9,19.9 68.9,22.7 68.9,25.5 68.619,49.516 68.492,52.437 68.492,55.231 68.7,77.1 68.7,79.9 68.7,82.8
VCC_SENSE: C12.2 P1.12 R4.1 R23.2
VIRTUAL_N: C24.2 R10.2 R12.2 R14.2 U3.3 U4.3 U5.3 | length 101.9
  Top Layer w0.508: v1(35.5,25.8) 35.574,25.874 38.093,25.874 38.093,27.493 40.5,29.9 45.8,29.9 49.8,33.9 49.8,36.9 49,37.7 49,52.694 48.7,52.994 v1(48.7,53.2) 45.8,53.2 44.8,52.2 R12.2 ; U3.3 43.099,69.75 43.549,70.2 45.1,70.2 46.938,68.362 46.938,65.338 44.121,62.521 R10.2 43.058,59.858 42.4,59.2 42.4,57.6 41.6,56.8 41.6,50.916 41.595,50.911 44.789,50.911 R12.2@44.789,50.989 ; U4.3 42.792,42.35 43.642,43.2 43.642,44.942 v1(43.7,45) ; v1(41.6,18.1) 41.644,18.056 41.644,15.525 41.669,15.5 U5.3
  Bottom Layer w0.508: v1(35.5,25.8) 41.454,19.846 41.454,18.246 v1(41.6,18.1) ; v1(43.7,45) 43.7,48.2 v1(48.7,53.2)
VOA_1: Q1.4 U7.7 | length 26.4
  Top Layer w0.508: U7.7 15.292,73.118 17.883,73.118 v1(17.9,73.1) ; v1(84.5,85.7) 84.5,82.051 84.551,82 Q1.4
  Bottom Layer w0.508: 65.7,84 68,86.3 83.821,86.3 84.421,85.7 v1(84.5,85.7)
VOA_2: Q3.4 U8.7
VOA_3: Q5.4 U9.7
VOB_1: Q2.4 U7.5 | length 4.4
  Top Layer w0.508: U7.5 15.554,70.595 15.6,70.549 v1(15.6,68.7) ; v1@77.03,60.63 v1(77.03,60.643) Q2.4
  Bottom Layer w0.508: v1@76.824,60.643 v1(77.03,60.643)
VOB_2: Q4.4 U8.5
VOB_3: Q6.4 U9.5
VPS_A: D3.1 Q2.1 Q2.2 Q2.3 R3.2 U1.3 | length 8.8
  Top Layer w0.508: U1.3 61.294,69.406 62,68.7 65.8,68.7 67.2,67.3 67.2,66.5 ; 66.85,66.325 66.894,66.369 ; R3.2@66.856,64.121 R3.2@66.894,64.159
  other v1: 70.994,62.47 70.994,65.264
VPS_B: D6.1 Q4.1 Q4.2 Q4.3 R6.2 U2.3 | length 10.4
  Top Layer w0.508: U2.3 65.113,42.287 68.5,38.9 68.5,38 ; R6.2@67.075,35.811 67.562,35.324 ; 67.075,37.55 67.075,37.625 67.086,37.636
  other v1: 70.14,34.022 70.14,36.816
ZCD_PHV_U: P1.15 R9.1 U3.4 | length 5.5
  Top Layer w0.508: v1(35.45,72.05) R9.1 35.55,69.775 38.745,69.775 U3.4
ZCD_PHV_V: P1.14 R19.1 U4.4 | length 6
  Top Layer w0.508: v1(35.4,44.9) 35.45,44.85 35.45,42.45 R19.1 38.399,42.4 38.449,42.35 U4.4
ZCD_PHV_W: P1.13 R20.1 U5.4 | length 7.1
  Top Layer w0.508: R20.1@35.5,15.7 R20.1 v1(35.6,17.6) 37.8,17.6 39.156,16.244 39.156,15.525 39.182,15.5 U5.4
copper on no net: | length 34.5
  Top Layer w0.508: 17.5,60.17 17.515,60.185 19.685,60.185 v1(19.7,60.2) ; v1@19.725,49.075 v1(19.8,49) ; 72.512,7.154 74.412,7.154 ; 86.035,18.584 86.088,18.531 v1(86.088,16.488) ; 86.089,47.294 86.142,47.241 v1(86.142,45.198)
  Bottom Layer w0.508: 62.4,17.2 65.4,14.2 84.1,14.2 85.758,15.858 85.758,15.952 86.088,16.282 v1(86.088,16.488)

## Polygon pours and split planes (outlines as drawn)
GND on Int1 (GND) "GND_L02_P000" (solid, pour order 0): 0,87 20.3,87 20.3,26.4 0,26.4
AGND on Int1 (GND) "AGND_L02_P001" (solid, pour order 1): 22.7,23.3 0,23.3 0,0 100,0 100,87 22.7,87
no net on Int2 (V12) "NONET_L03_P002" (solid, pour order 2): 0.051,87 20.3,87 20.3,0 -0.051,0
V12 on Int2 (V12) "V12_L03_P003" (solid, pour order 3): 28.2,87 100,87 100,0 28.2,0
V12 on Top Layer "V12_L01_P004" (solid, pour order 4): 82.6,73.265 82.885,73.55 82.932,73.55 82.932,85.65 82.66,85.965 69.065,85.965 66.5,83.4 66.5,76 69.235,73.265
NetD9_1 on Top Layer "NETD9_1_L01_P018" (solid, pour order 18): 67.75,3.3 66.195,3.3 64.244,4.935 64.244,9.122 65.006,9.884 69.959,9.884 71.575,11.5 76.225,11.5 76.575,11.15 76.575,4.125 75.75,3.3
PHC on Top Layer "PHC_L01_P017" (solid, pour order 17): 77.85,2.35 78.2,2 89.5,2 91.6,4.1 94.8,4.1 98.1,8.2 98.1,25.5 96.444,27.156 90.544,27.156 83.548,27.156 83.35,26.958 83.35,19.7 83.35,19.45 83.6,19.2 88.1,19.2 88.6,18.7 88.6,15.7 87.6,14.7 78.35,14.7 77.85,14.2
V12 on Top Layer "V12_L01_P015" (solid, pour order 15): 66.4,26.2 66.4,18.5 68.7,16.2 81.6,16.2 82.1,16.7 82.1,27.95 81.1,28.95 69.15,28.95
VPS_A on Top Layer "VPS_A_L01_P013" (solid, pour order 13): 77.852,63.252 77.8,63.2 75.2,63.2 75.2,63.1 74.1,62 74.1,60.311 66.575,60.311 66.566,60.3 65.914,60.952 65.914,66.178 66.336,66.6 70.298,66.6 72.264,68.566 77.852,68.566
VPS_B on Top Layer "VPS_B_L01_P011" (solid, pour order 11): 65.568,38.086 64.806,37.324 64.806,33.006 65.568,32.244 67.092,32.244 67.6,31.736 76.934,31.736 76.934,39.864 71.156,39.864 69.378,38.086
PHB on Top Layer "PHB_L01_P009" (solid, pour order 9): 83.391,55.764 83.62,55.993 89.825,55.993 96.507,55.993 98.5,54 98.5,35.917 94.7,32.117 90.714,32.117 89.19,30.593 78.55,30.593 78.268,30.857 78.268,42.912 78.522,43.166 88.891,43.166 89.375,43.65 89.375,47.475 88.858,47.992 83.391,47.992
V12 on Top Layer "V12_L01_P008" (solid, pour order 8): 81.775,44.817 82.133,45.175 82.15,45.175 82.15,57.064 81.824,57.39 67.99,57.39 66.1,55.5 66.1,48 69.283,44.817
PHA on Top Layer "PHA_L01_P007" (solid, pour order 7): 96.064,85.271 96.035,85.3 89.2,85.3 87.2,83.3 87.2,82.1 86.5,81.392 83.821,81.392 83.821,76.694 84.075,76.44 89.751,76.44 90.2,75.999 90.2,72.15 89.664,71.614 79.4,71.614 79.216,71.55 78.741,71.075 78.741,59.775 78.775,59.775 79.2,59.295 89.536,59.295 92.076,61.835 95.6,61.835 98.8,65.635 98.8,82.535
AGND on Top Layer "AGND_L01_P012" (solid, pour order 12): 57.505,39.7 57.931,39.274 60.059,39.277 61.504,37.832 61.504,32.3 61.22,31.99 59.545,31.99 58.455,30.9 55.805,30.9 54.93,31.775 54.93,38.875 55.755,39.7
AGND on Top Layer "AGND_L01_P019" (solid, pour order 19): 60.614,4.197 59.52,3.102 58.681,3.102 57.049,1.47 54.389,1.47 53.689,2.17 53.689,10.27 53.764,10.27 54.564,11.07 56.764,11.07 57.614,10.22 59.844,10.22 60.614,9.45
AGND on Top Layer "AGND_L01_P014" (solid, pour order 14): 61.973,61.025 62.739,61.868 62.739,66.077 61.774,67.042 58.109,67.042 58.062,67.042 57.686,67.418 55.668,67.399 54.899,66.758 54.899,60.6 55.85,59.649 58.868,59.649 60.244,61.025
PHA on Bottom Layer "PHA_L04_P026" (solid, pour order 26): 83.44,64.248 84.71,62.978 94.87,62.978 98.9,67.008 98.9,82.2 96.6,84.5 85.404,84.5 83.948,83.044 83.948,78.472 84.71,77.71 88.52,77.71 89.79,76.44 89.79,71.106 87.504,68.82 84.71,68.82 83.44,67.55
VPS_A on Bottom Layer "VPS_A_L04_P028" (solid, pour order 28): 81.916,67.55 81.916,63.74 81.154,62.978 74.55,62.978 72.518,60.946 67.438,60.946 66.676,61.708 66.676,65.772 68.708,67.804 81.662,67.804
V12 on Bottom Layer "V12_L04_P027" (solid, pour order 27): 82.424,78.472 81.408,77.456 74.296,77.456 71.756,74.916 68.454,74.916 67.438,75.932 67.438,83.806 69.216,85.584 73.026,85.584 74.804,83.806 81.662,83.806 82.424,83.044
VPS_B on Bottom Layer "VPS_B_L04_P025" (solid, pour order 25): 81.062,38.34 81.062,33.768 80.3,33.006 74.458,33.006 72.68,31.228 69.822,31.228 68.362,32.396 68.362,38.086 69.378,39.102 74.458,39.102 74.966,38.594 80.554,38.594
V12 on Bottom Layer "V12_L04_P024" (solid, pour order 24): 81.57,54.088 81.57,50.278 80.554,49.262 73.95,49.262 71.918,47.23 67.346,47.23 66.33,48.246 66.33,56.12 68.362,58.152 71.664,58.152 74.458,55.358 80.3,55.358
PHB on Bottom Layer "PHB_L04_P023" (solid, pour order 23): 83.094,53.834 83.094,50.024 83.856,49.262 87.666,49.262 89.444,47.484 89.444,39.864 88.428,38.848 82.84,38.848 82.332,38.34 82.332,34.022 83.348,33.006 95.032,33.006 98.7,36.674 98.7,53.2 96.4,55.5 84.094,55.5
NetD9_1 on Bottom Layer "NETD9_1_L04_P022" (solid, pour order 22): 81.262,11.916 81.262,7.852 79.992,6.582 75.674,6.582 72.372,3.28 65.26,3.28 64.752,3.788 64.752,9.376 65.514,10.138 71.61,10.138 73.896,12.424 80.754,12.424
V12 on Bottom Layer "V12_L04_P021" (solid, pour order 21): 73.134,20.298 80.246,20.298 81.516,21.568 81.516,26.14 81.008,26.648 73.642,26.648 71.61,28.68 67.8,28.68 66.53,27.41 66.53,18.52 67.292,17.758 70.594,17.758
PHC on Bottom Layer "PHC_L04_P020" (solid, pour order 20): 98.5,25 98.5,10.764 94.8,7.065 83.446,7.065 82.583,7.928 82.583,11.713 83.243,12.373 87.968,12.373 88.933,13.338 88.933,19.333 88.069,20.196 84.564,20.196 82.964,21.797 82.964,27.181 83.675,28.045 95.455,28.045

## Silkscreen, mask and mechanical layers (free items; w line width, h text height)
Top Overlay:
  text "BLDC Bridge Board 2.0" at 1.9,83.6 h2.54
  text "Designed by Mgm" at 1.8,81.179 h2.54